# EAGLE board DicioFinal1 (EAGLE 7.5.0)
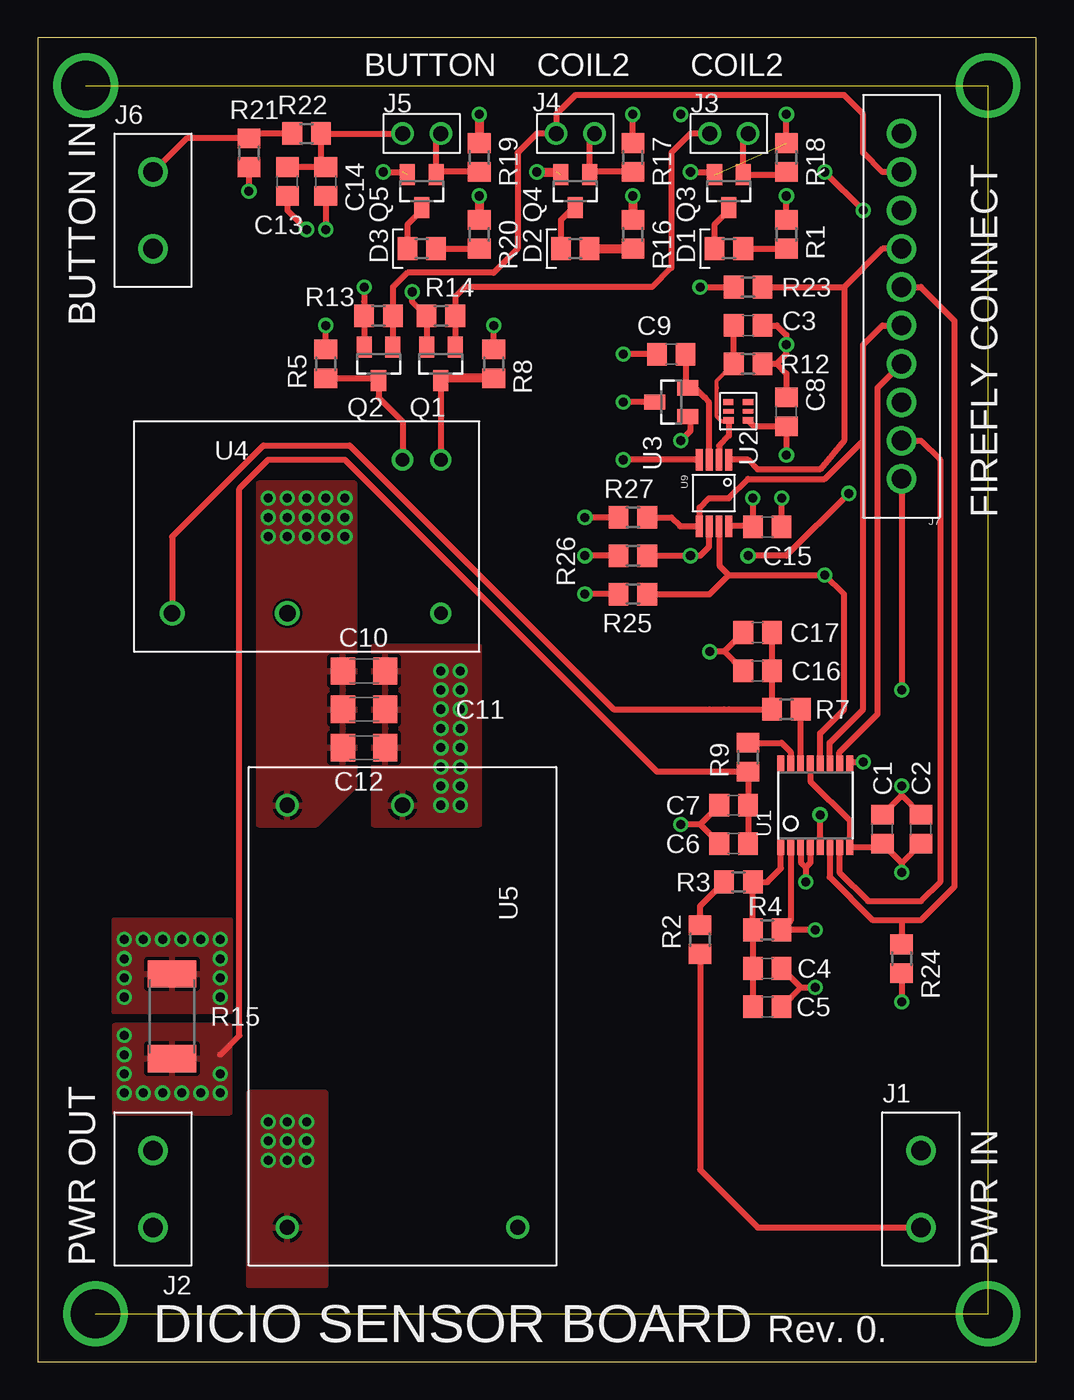
[diagram p0: board, top side]
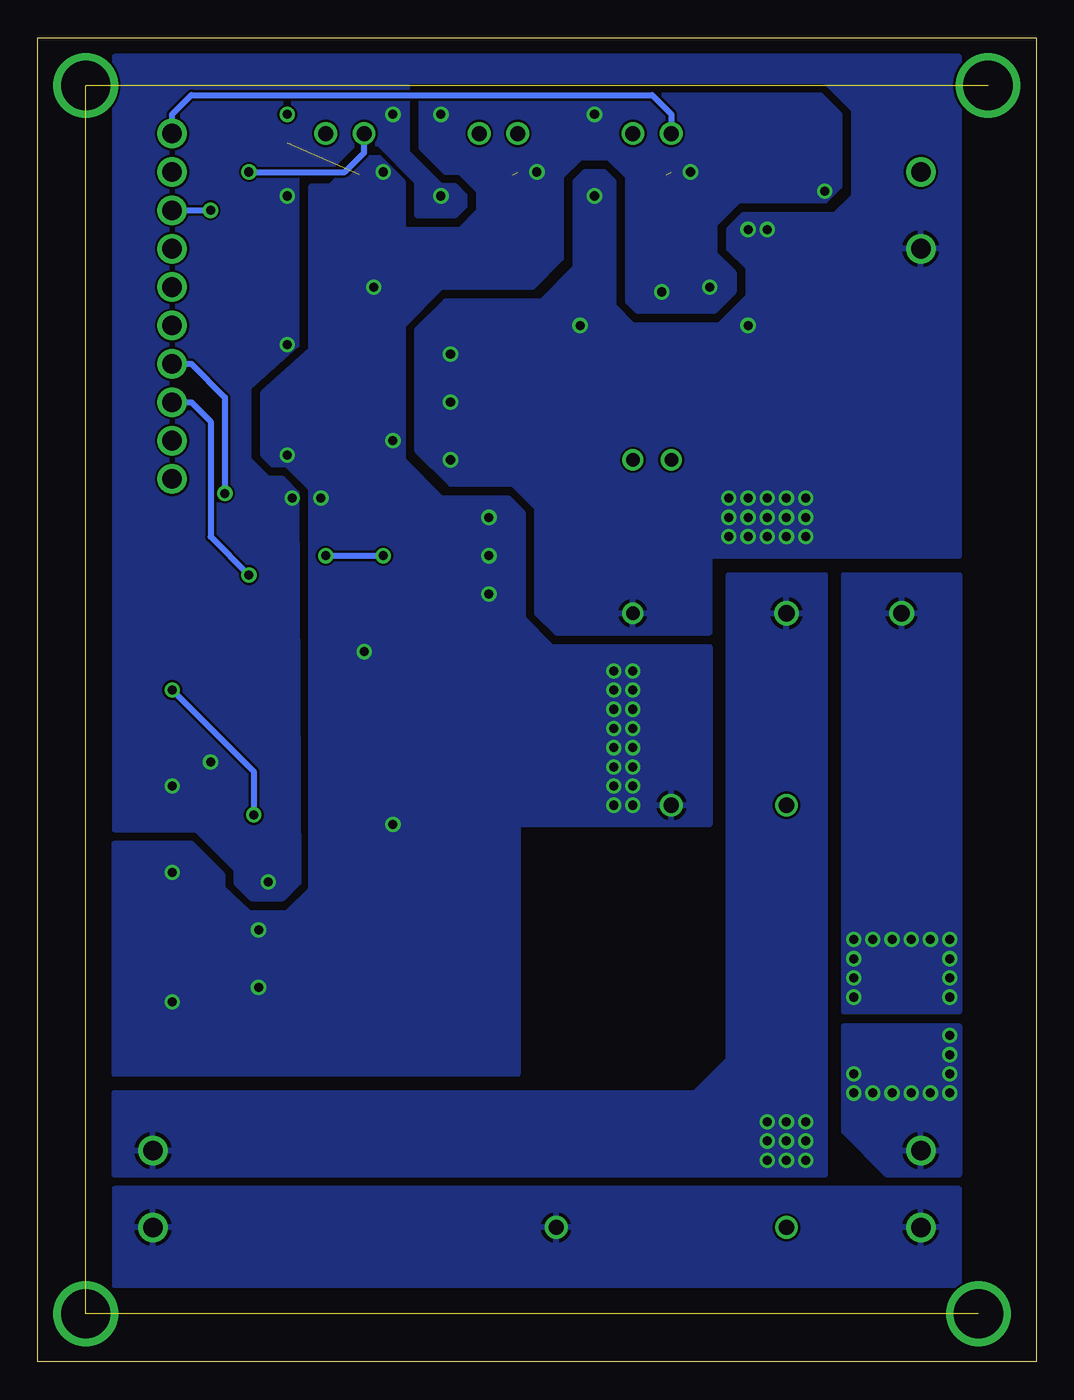
[diagram p1: board, bottom side, seen from below]

Size 66.04 x 87.62 mm. Coordinates in mm from the lower left corner, seen from the top.
Outline: 0,0 66.04,0 66.04,87.62 0,87.62 0,0
Copper layers (1*16): Top 0.035mm / dielectric 1.5mm / Bottom 0.035mm
Design rules "default *": minimum track width 10mil, minimum drill 20mil, track to track 6mil, track to pad 6mil, pad to pad 6mil, via to via 6mil, smd to smd 6mil, copper to edge 40mil, drill to drill 8mil, minimum pad ring 10mil, minimum via ring 8mil, stop-mask expansion 4mil, vias tented up to drill 0mil, thermal gap 10mil

## Footprints (pad centres in the part's own frame; a part is rotated, then mirrored left to right if it is on the bottom)
C0805 = smd 1.3 x 1.5: 1 -0.95,0; 2 0.95,0
C1206 = smd 1.6 x 1.8: 1 -1.4,0; 2 1.4,0
L0805 = smd 1.3 x 1.5: 1 -0.95,0; 2 0.95,0
[TERM][2][0.2] = drill 1.3: P$1 0,0; P$2 0,-5.08
JMP2 = drill 0.991: P$1 0,0; P$2 0,-2.54
TERM10 = drill 1.3: P$1 0,0; P$2 0,-2.54; P$3 0,-5.08; P$4 0,-7.62; P$5 0,-10.16; P$6 0,-12.7; P$7 0,-15.24; P$8 0,-17.78; P$9 0,-20.32; P$10 0,-22.86
SOT23 = smd 1 x 1.4: 1 -0.95,-1.1; 2 0.95,-1.1; 3 0,1.1
R0805 = smd 1.3 x 1.5: 1 -0.95,0; 2 0.95,0
R2512 = smd 1.8 x 3.2: 1 -2.8,0; 2 2.8,0
TSSOP16 = smd 0.45 x 1.05: 1 -2.275,-2.768; 2 -1.625,-2.768; 3 -0.975,-2.768; 4 -0.325,-2.768; 5 0.325,-2.768; 6 0.975,-2.768; 7 1.625,-2.768; 8 2.275,-2.768; 9 2.275,2.768; 10 1.625,2.768; 11 0.975,2.768; 12 0.325,2.768; 13 -0.325,2.768; 14 -0.975,2.768; 15 -1.625,2.768; 16 -2.275,2.768
APDS-9005 = smd 0.4 x 0.7: 1 1.2,0; 3 0,0; 6 1.2,-1.3 | smd 0.3 x 0.7: 2 0.6,0; 5 0.6,-1.3 | smd 0.4 x 0.67: 4 0,-1.3
DK-1A-L2-3 = drill 0.889: P$1 0,0; P$5 2.54,-10.16; P$6 0,-10.16 | drill 1.092: P$3 10.16,0; P$4 17.78,0
RAC01-3.3 = drill 1: P$1 0,0; P$2 0,-15.24; P$3 27.94,0; P$4 27.94,-7.62
MSOP-8[MCP3202] = smd 1.45 x 0.45: 1 0,0; 2 0,-0.65; 3 0,-1.3; 4 0,-1.95; 5 4.4,-1.95; 6 4.4,-1.3; 7 4.4,-0.65; 8 4.4,0

## Placement (x,y rotation side)
C1  0.1u  [C0805]  55.88,35.24 90 top
C2  0.1u  [C0805]  58.42,35.24 90 top
C3  0.1u  [C0805]  46.99,68.58 0 top
C4  100n  [C0805]  48.26,26.04 0 top
C5  1000p  [C0805]  48.26,23.5 0 top
C6  1000p  [C0805]  46.04,34.29 180 top
C7  100n  [C0805]  46.04,36.83 180 top
C8  0.1u  [C0805]  49.53,62.87 90 top
C9  0.1u  [C0805]  41.91,66.67 180 top
C10  100u  [C1206]  21.59,45.72 180 top
C11  100u  [C1206]  21.59,43.18 180 top
C12  100u  [C1206]  21.59,40.64 180 top
C13  0.1u  [C0805]  16.51,78.11 270 top
C14  0.1u  [C0805]  19.05,78.11 270 top
C15  0.1u  [C0805]  48.26,55.24 0 top
C16  100n  [C0805]  47.62,45.72 180 top
C17  1000p  [C0805]  47.62,48.26 180 top
D1  LED-[0805]  [L0805]  45.72,73.66 0 top
D2  LED-[0805]  [L0805]  35.56,73.66 0 top
D3  LED-[0805]  [L0805]  25.4,73.66 0 top
J1  WTB-2  [[TERM][2][0.2]]  58.42,13.97 0 top
J2  WTB-2  [[TERM][2][0.2]]  7.62,8.89 180 top
J3  JMP2  [JMP2]  46.99,81.28 270 top
J4  JMP2  [JMP2]  36.83,81.28 270 top
J5  JMP2  [JMP2]  26.67,81.28 270 top
J6  WTB-2  [[TERM][2][0.2]]  7.62,78.74 0 top
J7  TERM10  [TERM10]  57.15,58.42 180 top
Q1  BSS84  [SOT23]  26.67,66.04 180 top
Q2  BSS84  [SOT23]  22.54,66.04 180 top
Q3  BSS84  [SOT23]  45.72,77.47 180 top
Q4  BSS84  [SOT23]  35.56,77.47 180 top
Q5  BSS84  [SOT23]  25.4,77.47 180 top
R1  150  [R0805]  49.53,74.61 270 top
R2  1M  [R0805]  43.81,27.94 90 top
R3  1M  [R0805]  46.35,31.75 0 top
R4  750  [R0805]  48.26,28.57 0 top
R5  10k  [R0805]  19.05,66.04 270 top
R7  750  [R0805]  49.53,43.18 0 top
R8  10k  [R0805]  30.16,66.04 270 top
R9  750  [R0805]  46.99,40.01 90 top
R12  3.3k  [R0805]  46.99,66.04 180 top
R13  10k  [R0805]  22.54,69.22 180 top
R14  10k  [R0805]  26.67,69.22 180 top
R15  4m  [R2512]  8.89,22.86 270 top
R16  150  [R0805]  39.37,74.61 270 top
R17  10k  [R0805]  39.37,79.69 90 top
R18  10k  [R0805]  49.53,79.69 90 top
R19  10k  [R0805]  29.21,79.69 90 top
R20  150  [R0805]  29.21,74.61 270 top
R21  10k  [R0805]  13.97,80.01 270 top
R22  3.3k  [R0805]  17.78,81.28 0 top
R23  10k  [R0805]  46.99,71.12 180 top
R24  10k  [R0805]  57.15,26.67 270 top
R25  10k  [R0805]  39.37,50.8 180 top
R26  10k  [R0805]  39.37,53.34 180 top
R27  10k  [R0805]  39.37,55.88 180 top
U1  78MM6610+PSU  [TSSOP16]  51.44,36.83 0 top
U2  APDS-9005  [APDS-9005]  46.99,63.5 270 top
U3  MCP9700  [SOT23]  41.91,63.5 90 top
U4  DK-1A-L2-3  [DK-1A-L2-3]  26.67,49.53 180 top
U5  RAC01-3.3  [RAC01-3.3]  16.51,8.89 90 top
U9  MCP3202  [MSOP-8[MCP3202]]  45.72,59.69 270 top

## Library data of the parts
C1-C9 C13-C17 = resistor; DKPN: 399-1249-1-ND
C10-C12 = resistor; DKPN: 490-7217-1-ND
D1 = TORO; COLOR: GREEN; DKPN: 160-1218-1-ND
D2 = TORO; COLOR: RED; DKPN: 475-1415-1-ND
D3 = TORO; COLOR: YELLOW; DKPN: 475-2560-1-ND
J1 J2 J6 = TORO; DKPN: ED2580-ND
J3-J5 = TORO; DKPN: S1011EC-02-ND
J7 = TORO
Q1-Q5 = TORO; DKPN: BSS84CT-ND
R1 R16 R20 = resistor; DKPN: 311-150ARCT-ND
R2 R3 = resistor; DKPN: 311-1.00MCRCT-ND
R4 R7 R9 = resistor; DKPN: 311-750ARCT-ND
R5 R8 R13 R14 R17-R19 R21 R23-R27 = resistor; DKPN: 311-10KARCT-ND
R12 R22 = resistor; DKPN: 311-3.30KCRCT-ND
R15 = resistor; DKPN: 696-1181-1-ND
U1 = TORO; DKPN: 78M6610+PSU/C48-ND
U2 = TORO; DKPN: 516-1717-1-ND
U3 = TORO; DKPN: MCP9700T-E/TTCT-ND
U4 = TORO; DKPN: 255-2053-ND
U5 = TORO; DKPN: 945-1400-5-ND
U9 = TORO; DKPN: MCP3202-CI/SN-ND

## Nets
!ALARM!: J7.P$2 U1.7
!BIN!: J6.P$1 R21.1 R22.1
!BUTTON!: C13.1 C14.1 J5.P$2 J7.P$10 R22.2
!C1_EN!: J3.P$2 J7.P$8 Q1.1 R14.1
!C2_EN!: J4.P$2 J7.P$9 Q2.1 R13.1
!CS_PWR!: J7.P$6 R24.1 U1.6
!CS_SENSE!: J7.P$7 R23.1 U9.1
!FAULT!: J7.P$1 U1.5
AIP: C16.1 C17.1 R7.1 R15.1 U4.P$4
C1: Q1.3 R8.2 U4.P$6
C2: Q2.3 R5.2 U4.P$5
GND: C1.2 C2.2 C3.2 C8.2 C9.2 C10.2 C11.2 C12.2 C13.2 C14.2 C15.2 J6.P$2 R1.1 R5.1 R8.1 R12.1 R16.1 R20.1 U1.3 U1.4 U1.9 U3.3 U4.P$1 U5.P$3 U9.4
MISO: J7.P$4 R26.1 U1.10 U9.6
MOSI: J7.P$5 R27.1 U1.11 U9.5
N$1: C4.1 C5.1 R3.2 R4.1 U1.1
N$2: J3.P$1 Q3.1 R18.1
N$3: R2.2 R3.1
N$5: D2.1 Q4.3
N$6: J4.P$1 Q4.1 R17.1
N$7: D1.1 Q3.3
N$10: D1.2 R1.2
N$11: D2.2 R16.2
N$12: J5.P$1 Q5.1 R19.1
N$13: D3.1 Q5.3
N$14: D3.2 R20.2
N$15: R7.2 U1.14
N$17: R9.2 U1.15
NOUT: C6.1 C7.1 J2.P$2 R9.1 R15.2
S_LIGHT: C3.1 R12.2 U2.6 U9.2
S_TEMP: C9.1 U3.2 U9.3
SCLK: J7.P$3 R25.1 U1.12 U9.7
VACL: J1.P$2 J2.P$1 R2.1 U5.P$2
VACN: J1.P$1 U4.P$3 U5.P$1
VDD: C1.1 C2.1 C4.2 C5.2 C6.2 C7.2 C8.1 C10.1 C11.1 C12.1 C15.1 C16.2 C17.2 Q1.2 Q2.2 Q3.2 Q4.2 Q5.2 R4.2 R13.2 R14.2 R17.2 R18.2 R19.2 R21.2 R23.2 R24.2 R25.2 R26.2 R27.2 U1.2 U1.8 U1.13 U2.1 U3.1 U5.P$4 U9.8

## Tracks (layer width: path | path; a pad name or v marks a point on that pad's centre or on a via)
!ALARM!
  Top 0.406: U1.7 53.02,34.02 53.02,32.38 54.93,30.48 58.42,30.48 59.69,31.75 59.69,59.69 58.42,60.96 J7.P$2
!BIN!
  Top 0.406: R22.1 14.29,81.28 | R21.1 9.84,80.96 J6.P$1
  Top 0.61: 14.29,81.28 R21.1
!BUTTON!
  Top 0.406: J5.P$2 R22.2 18.73,79.38 | C14.1 C13.1
  Top 0.61: 18.73,79.38 C14.1
  Bottom 0.406: J7.P$10 57.15,82.55 55.88,83.82 25.4,83.82 24.13,82.55 J5.P$2
!C1_EN!  (via drill 0.6)
  Top 0.406: R14.1 Q1.1 | J3.P$2 43.18,81.28 41.91,80.01 41.91,72.39 40.64,71.12 28.26,71.12 27.62,70.48 R14.1 | v54.61,76.2 v52.07,78.74
  Top 0.61: 27.79,67.31 Q1.1 | R14.1
  Bottom 0.406: J7.P$8 v54.61,76.2 | v52.07,78.74 45.72,78.74 44.45,80.01 J3.P$2
!C2_EN!
  Top 0.406: R13.1 Q2.1 | R13.1 23.5,71.12 24.45,72.07 30.16,72.07 31.75,73.66 31.75,80.01 33.02,81.28 J4.P$2 34.29,82.55 35.56,83.82 53.34,83.82 54.61,82.55 54.61,80.01 55.88,78.74 J7.P$9
  Top 0.61: R13.1
!CS_PWR!
  Top 0.406: U1.6 52.39,33.77 52.39,32.07 55.24,29.21 57.15,29.21 | J7.P$6 58.42,71.12 60.64,68.9 60.64,31.43 58.42,29.21 57.15,29.21 | 57.15,29.21 R24.1
!CS_SENSE!
  Top 0.406: J7.P$7 55.88,73.66 53.34,71.12 | 53.34,71.12 53.34,60.96 51.75,59.05 47.62,59.05 46.99,59.69 U9.1 | R23.1 53.34,71.12
!FAULT!  (via drill 0.6)
  Top 0.406: U1.5 v51.75,36.2 | J7.P$1 v57.15,44.45
  Bottom 0.406: 51.76,36.28 51.75,36.28 | v57.15,44.45 51.75,39.05 51.75,36.28 | 51.75,36.28 v51.75,36.2
AIP  (via drill 0.6)
  Top 0.406: C17.1 C16.1 R7.1 45.72,43.18 45.4,43.18 44.45,43.18 38.1,43.18 20.64,60.64 14.92,60.64 8.89,54.61 U4.P$4
  other vias: 5.71,25.4 5.71,24.13 5.71,26.67 5.71,27.94 6.99,27.94 8.26,27.94 9.53,27.94 10.79,27.94 12.06,27.94 12.06,26.67 12.06,25.4 12.06,24.13
  pour Bottom: 5.08,23.18 12.7,23.18 12.7,52.07 5.08,52.07
  pour Top: 5.08,23.18 5.08,29.21 12.7,29.21 12.7,23.18
C1
  Top 0.406: Q1.3 U4.P$6
  Top 0.61: R8.2 26.82,65.09 Q1.3
C2
  Top 0.406: R5.2 22.39,65.09 | Q2.3 22.54,63.82 24.13,62.23 U4.P$5
  Top 0.61: 22.39,65.09 Q2.3
GND  (via drill 0.6)
  Top 0.406: C14.2 v19.05,74.93 | R1.1 v49.53,77.15 | R5.1 v19.05,68.58 | R8.1 v30.16,68.58 | C13.2 16.51,76.2 v17.78,74.93 | C9.2 v38.73,66.67 | U3.3 v38.73,63.5 | U9.4 43.81,59.65 43.5,59.69 v38.73,59.69 | C15.2 v49.21,57.15 | C3.2 48.9,68.58 49.53,67.94 v49.53,67.31 49.53,66.67 48.9,66.04 | R12.1 48.9,66.04 | 48.9,66.04 49.53,65.41 C8.2 | U1.3 50.48,34.04 50.48,33.02 50.8,32.7 | U1.4 51.12,33.02 50.8,32.7 | 50.8,32.7 v50.8,31.75 | C2.2 57.15,37.47 | 57.15,37.47 v57.15,38.1 | U1.9 53.8,39.69 v54.61,39.69 | 57.15,37.47 C1.2
  Top 0.61: v29.21,77.15 R20.1 | v39.37,77.15 R16.1
  other vias: 16.51,54.61 15.24,54.61 42.55,82.55 17.78,54.61 19.05,54.61 20.32,54.61 20.32,55.88 17.78,55.88 19.05,55.88 16.51,55.88 15.24,55.88 15.24,57.15 16.51,57.15 17.78,57.15 19.05,57.15 20.32,57.15
  pour Top: 20.95,38.1 20.95,58.1 14.61,58.1 14.61,35.56 18.41,35.56
  pour Bottom: 33.02,49.53 31.75,48.26 21.59,48.26 21.59,53.34 5.08,53.34 5.08,86.36 60.96,86.36 60.96,35.24 55.56,35.24 52.9,32.58 52.9,31.69 51.88,30.67 49.85,30.67 48.77,31.75 48.9,57.47 49.85,58.42 50.8,58.42 52.07,59.69 52.07,64.45 48.9,67.31 48.9,78.74 46.99,78.74 45.09,80.64 43.5,80.64 40.96,78.11 40.96,75.88 38.42,75.88 37.78,76.52 37.78,77.15 38.42,77.79 39.37,77.79 41.59,80.01 41.59,84.77 13.97,84.77 12.06,82.87 12.06,77.15 13.34,75.88 19.37,75.88 20.32,74.93 20.32,73.66 19.05,72.39 19.05,70.48 20.95,68.58 26.67,68.58 27.94,69.85 27.94,78.11 28.57,78.74 29.84,78.74 30.48,78.11 30.48,72.39 32.7,70.17 39.05,70.17 40.96,68.26 40.96,60.33 38.73,58.1 34.61,58.1 33.02,56.52
MISO  (via drill 0.6)
  Top 0.406: v53.66,57.47 49.53,53.34 v46.99,53.34 | R26.1 v43.18,53.34 43.81,53.34 44.42,53.95 U9.6 | U1.10 53.02,39.63 53.02,40.32 55.56,42.86 55.56,64.45 J7.P$4
  Bottom 0.406: J7.P$4 55.88,66.04 53.66,63.82 v53.66,57.47 | v46.99,53.34 v43.18,53.34
MOSI
  Top 0.406: U1.11 52.39,39.62 52.39,40.96 54.61,43.18 54.61,60.96 | 54.61,60.96 54.61,67.31 55.88,68.58 J7.P$5 | 54.61,60.96 52.07,58.42 46.99,58.42 45.72,57.15 44.4,57.15 43.79,56.54 43.79,55.27 U9.5 42.5,55.29 41.91,55.88 R27.1
N$1
  Top 0.406: U1.1 49.16,32.65 48.26,31.75 R3.2 R4.1 C4.1 C5.1
N$2
  Top 0.406: J3.P$1 46.67,80.96 Q3.1 49.36,78.57
  Top 0.61: 49.36,78.57 R18.1
N$3
  Top 0.406: 45.09,31.62 45.21,31.75 R3.1 43.81,30.16 R2.2
N$4  (via drill 3.26)  (3 unrouted)
  other vias: 3.17,84.45 62.87,84.45 62.87,3.17 3.81,3.17
N$5
  Top 0.406: 35.41,76.37 34.61,75.56 D2.1
  Top 0.61: Q4.3 35.41,76.37 | D2.1
N$6
  Top 0.406: R17.1 36.68,78.74 | Q4.1 36.51,80.96 J4.P$1
  Top 0.61: 36.68,78.74 Q4.1
N$7
  Top 0.406: 45.72,76.2 44.77,75.25 D1.1
  Top 0.61: Q3.3 45.72,76.2 | D1.1
N$10
  Top 0.406: D1.2 R1.2
  Top 0.61: R1.2
N$11
  Top 0.61: D2.2 R16.2
N$12
  Top 0.406: Q5.1 26.35,80.96 J5.P$1 | R19.1 26.52,78.74
  Top 0.61: 26.52,78.74 Q5.1
N$13
  Top 0.406: 25.4,76.2 24.45,75.25 D3.1
  Top 0.61: Q5.3 25.4,76.2 | D3.1
N$14
  Top 0.406: D3.2 R20.2
  Top 0.61: R20.2
N$15
  Top 0.406: U1.14 50.48,39.62 R7.2
N$17
  Top 0.406: 49.85,39.63 U1.15 49.81,40.36 49.21,40.96 R9.2
NOUT  (via drill 0.6)
  Top 0.406: C6.1 C7.1 R9.1 40.95,39.05 20.32,59.69 15.24,59.69 13.34,57.78 13.34,21.59 12.06,20.32
  other vias: 5.71,21.59 5.71,20.32 5.71,19.05 5.71,17.78 6.99,17.78 8.26,17.78 9.53,17.78 10.79,17.78 12.06,17.78 12.06,19.05
  pour Bottom: 12.7,22.23 5.08,22.23 5.08,12.38 9.84,12.38 12.7,15.24
  pour Top: 5.08,22.23 5.08,16.51 12.7,16.51 12.7,22.23
S_LIGHT
  Top 0.254: 45.72,62.23 45.24,62.23 44.93,62.55 44.93,64.45 44.93,64.93 R12.2
  Top 0.406: R12.2 C3.1 | U2.6 45.72,62.27 45.72,62.23 45.72,61.28 45.07,60.63 U9.2
S_TEMP
  Top 0.406: C9.1 42.86,64.6 U3.2 43.5,64.45 44.13,63.82 44.42,63.47 U9.3
SCLK  (via drill 0.6)
  Top 0.406: R25.1 44.45,50.8 45.72,52.07 | U9.7 45.09,55.27 45.09,52.7 45.72,52.07 | 45.72,52.07 v52.07,52.07 53.34,50.8 53.34,43.18 51.75,41.59 U1.12
  Bottom 0.406: J7.P$3 55.88,63.5 54.61,62.23 54.61,54.61 v52.07,52.07
VACL
  Top 0.406: R2.1 43.81,12.7 47.62,8.89 J1.P$2
  pour Bottom: 60.96,11.43 60.96,5.08 5.08,5.08 5.08,11.43
VACN  (via drill 0.6)
  other vias: 16.51,13.34 15.24,13.34 17.78,13.34 15.24,14.61 16.51,14.61 17.78,14.61 17.78,15.88 16.51,15.88 15.24,15.88
  pour Bottom: 13.97,52.07 13.97,12.38 60.96,12.38 60.96,17.78 22.54,17.78 20.32,20 20.32,52.07
  pour Top: 13.97,17.78 13.97,5.08 19.05,5.08 19.05,17.78
VDD  (via drill 0.6)  (3 unrouted)
  Top 0.406: Q2.2 R13.2 21.59,70.17 v21.59,71.12 | Q1.2 R14.2 24.77,70.17 v24.77,70.8 | v22.86,78.74 24.13,78.74 | R17.2 v39.37,82.55 | v43.18,78.74 44.6,78.74 | R18.2 v49.53,82.55 | R21.2 v13.97,77.47 | U3.1 43.18,62.38 43.18,61.59 v42.55,60.96 | U9.8 47.27,55.29 C15.1 47.31,56.83 v47.31,57.15 | U2.1 47.38,61.91 C8.1 v49.53,60.01 | U1.13 51.12,38.42 53.71,35.83 U1.8 55.65,34.06 | 57.15,33.02 C2.1 | 55.65,34.06 55.88,33.83 | 55.65,34.06 C1.1 57.15,33.02 | 57.15,33.02 v57.15,32.38 | R24.2 v57.15,23.81 | R27.2 v36.2,55.88 | R26.2 v36.2,53.34 | v43.81,71.12 R23.2 | R25.2 v36.2,50.8 | U1.2 49.81,29.18 R4.2 v51.44,28.57 | C4.2 50.48,24.77 | C5.2 50.48,24.77 | 50.48,24.77 v51.44,24.77 | C7.2 43.82,35.56 | C6.2 43.82,35.56 | 43.82,35.56 v42.55,35.56 | C17.2 45.41,46.99 | C16.2 45.41,46.99 | 45.41,46.99 v44.45,46.99
  Top 0.61: v29.21,82.55 R19.2 | v33.02,78.74 34.29,78.74 | 44.6,78.74 Q3.2
  other vias: 26.67,40.64 26.67,39.37 26.67,41.91 26.67,43.18 26.67,44.45 26.67,45.72 27.94,45.72 27.94,44.45 27.94,43.18 27.94,41.91 27.94,40.64 27.94,39.37 27.94,38.1 27.94,36.83 26.67,36.83 26.67,38.1
  pour Top: 22.23,35.56 25.4,35.56 27.94,38.1 27.94,47.31 22.23,47.31
  pour Top: 22.23,35.56 29.21,35.56 29.21,47.31 22.23,47.31
  pour Bottom: 39.37,57.15 34.92,57.15 33.97,56.2 33.97,49.21 32.07,47.31 21.59,47.31 21.59,35.56 34.29,35.56 34.29,19.05 60.96,19.05 60.96,34.29 55.88,34.29 53.85,32.26 53.85,31.37 52.07,29.72 49.53,29.72 47.94,31.24 47.94,57.78 49.53,59.37 50.48,59.37 51.12,60.01 51.12,64.14 47.94,66.99 47.94,77.79 46.67,77.79 44.77,79.69 43.5,79.69 41.91,78.11 41.91,74.93 38.1,74.93 36.83,76.2 36.83,77.47 38.1,78.74 39.05,78.74 40.64,80.33 40.64,83.82 14.29,83.82 13.02,82.55 13.02,77.79 13.97,76.83 19.68,76.83 21.27,75.25 21.27,73.34 20,72.07 20,70.8 21.27,69.53 26.35,69.53 26.99,70.17 26.99,78.42 28.26,79.69 30.16,79.69 31.43,78.42 31.43,73.03 33.34,71.12 39.37,71.12 41.91,68.58 41.91,59.69

## Text on the board
tPlace: BUTTON | COIL2 | COIL2 | BUTTON IN | FIREFLY CONNECT | PWR OUT | PWR IN | DICIO SENSOR BOARD | Rev. 0.